# Altium PCB doergreie.PcbDoc
Units mil, origin at the board's own origin, x right, y up, seen from the top; angles counter-clockwise.
Board outline 1015 x 975 mil, 2 copper layers (Top Layer, Bottom Layer); 6 components, 7 nets, 29 pads, 0 vias.
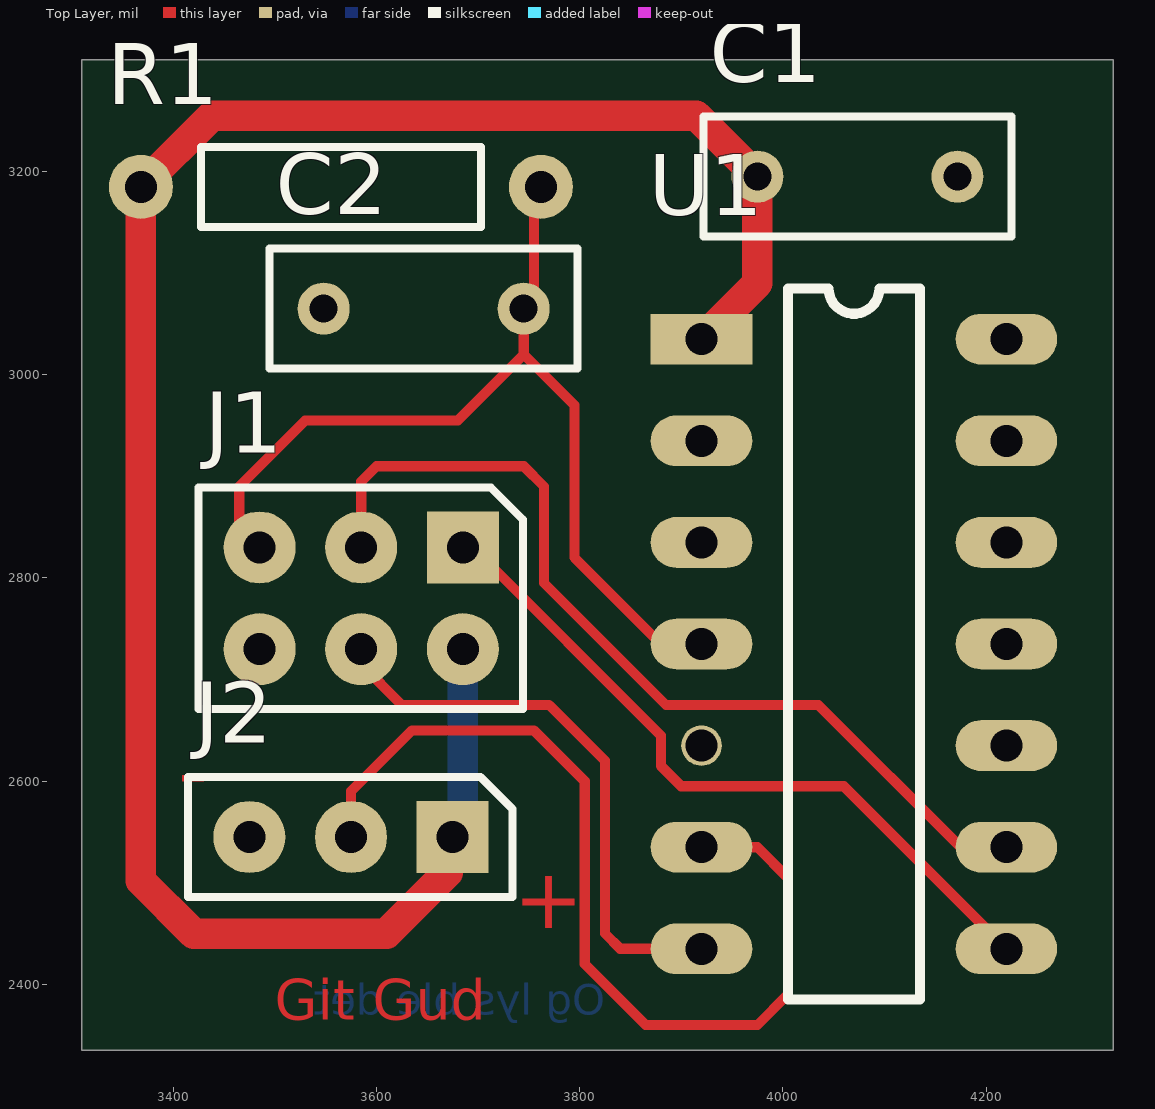
[diagram p0: Top Layer view]
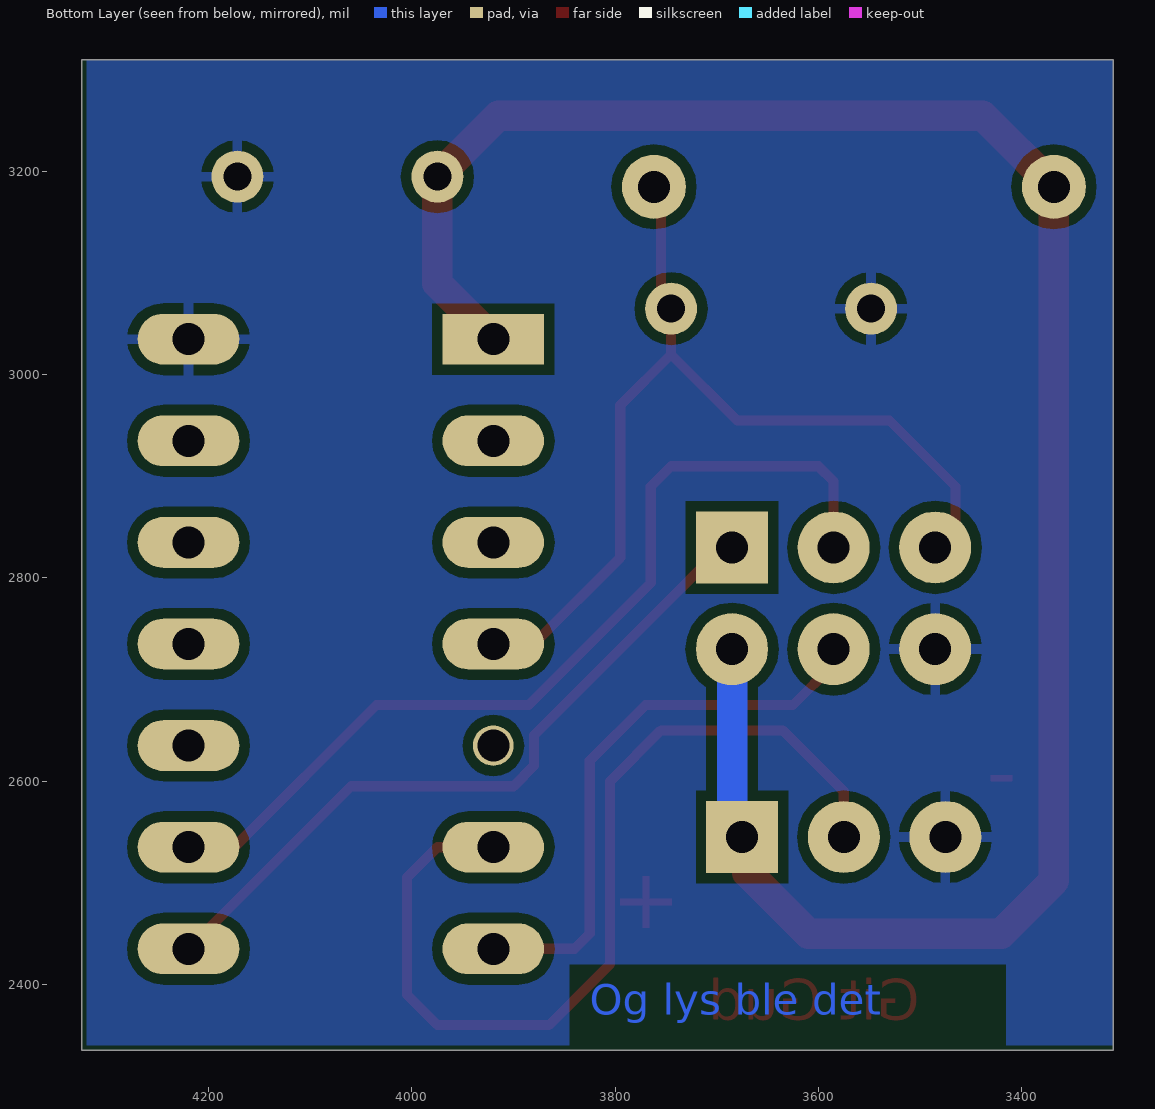
[diagram p1: Bottom Layer view, seen from below]
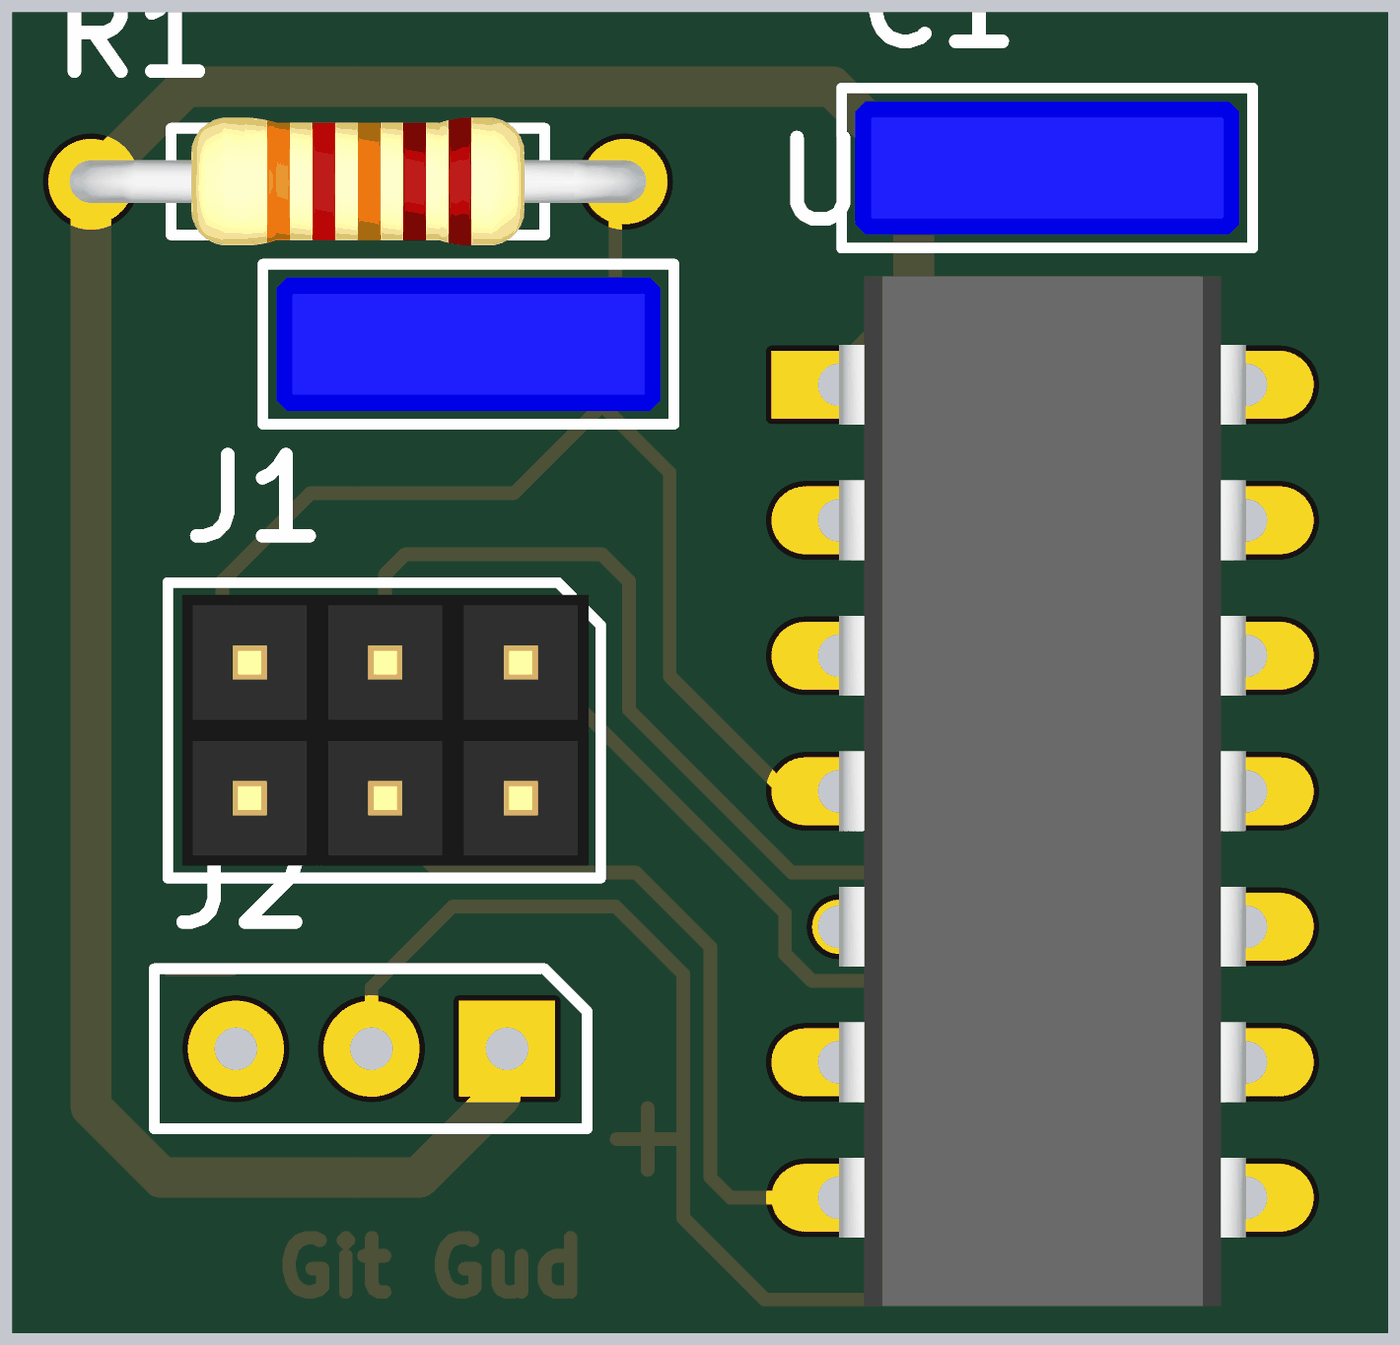
[diagram p2: 3D render of the assembled board from above, using the file's embedded part models]

## Layer stack, top to bottom
Top Solder: solder mask 0.4, Solder Resist, Dk 3.5
Top Layer: signal copper 1.4
Dielectric 1: dielectric 12.6, FR-4, Dk 4.8
Bottom Layer: signal copper 1.4
Bottom Solder: solder mask 0.4, Solder Resist, Dk 3.5

## Board outline
3310,3310 3310,2335 4325,2335 4325,3310

## Design rules (kind name [scope] priority, off if disabled: settings)
Clearance [All] p1: gap=10
PolygonConnect [All] p1: connectstyle=Relief reliefconductorwidth=10 reliefentries=4 polygonreliefangle="90 Angle" airgapwidth=10
RoutingVias [All] p1: holewidth=28 width=50 viastyle="Through Hole" minholewidth=28 minwidth=50 maxholewidth=28 maxwidth=50
SolderMaskExpansion [All] p1: expansion=4
Width [All] p1: maxlimit=50 minlimit=10 preferedwidth=10
30 further rules are at their usual default settings.

## Components (designator, comment, footprint, x,y, rotation, side; value= is the part's Value field where it differs from the comment)
C1 "100nF" CAPAR500W50L730T250H650 4171.85,3195 r180 top
C2 "100nF" CAPAR500W50L730T250H650 3548.15,3065 r0 top
J1 "Header2x3" HDRV6W64P254_2X3_762X508X900B 3585,2780 r270 top
J2 "Header1x3" HDRV3W64P254_1X3_762X254X900B 3575,2545 r270 top
R1 "56k" RESA_0.25W 3565,3185 r180 top
U1 "ATTINY84-20PU" DIP14 3920,3035 r0 top

## Footprints (in the part's own frame and the unit in brackets; to place one, negate y for a bottom-side part, rotate by r counter-clockwise, add the part's x,y. Pads: shape width x height; smd on the part's side, far side on the other; paste and mask are expansions set on the pad)
CAPAR500W50L730T250H650 [mm] "Lead Spacing=5.0mm, Lead Width=0.5mm, Body Length=7.3mm, Body thickness=2.5mm, Body Height=6.5mm"
  round 1.3 hole 0.7: 1(0,0) 2(5,0)
  silkscreen extent -1.35,-1.5 6.35,1.5, body extent -1.1,-1.25 6.1,1.25, height 6.5
DIP14 [mm]
  rect 2.54x1.27 hole 0.8: 1(0,0)
  oval 2.54x1.27 hole 0.8: 2(0,-2.54) 3(0,-5.08) 4(0,-7.62) 6(0,-12.7) 7(0,-15.24) 8(7.62,-15.24) 9(7.62,-12.7) 10(7.62,-10.16) 11(7.62,-7.62) 12(7.62,-5.08) 13(7.62,-2.54) 14(7.62,0)
  round 1.016 hole 0.8: 5(0,-10.16)
  silkscreen extent 2.16,-16.51 5.46,1.27, body extent 0,-17.27 7.62,2.03, height 4.15
HDRV3W64P254_1X3_762X254X900B [mm] "Header 1x3"
  rect 1.8x1.8 hole 0.8: 1(0,2.54)
  round 1.8 hole 0.8: 2(0,0) 3(0,-2.54)
  silkscreen extent -1.5,-4.07 1.5,4.04
HDRV6W64P254_2X3_762X508X900B [mm] "Header 2x3"
  rect 1.8x1.8 hole 0.8: 1(-1.27,2.54)
  round 1.8 hole 0.8: 2(1.27,2.54) 3(-1.27,0) 4(1.27,0) 5(-1.27,-2.54) 6(1.27,-2.54)
  silkscreen extent -2.77,-4.07 2.77,4.04, body extent -2.54,-3.81 2.54,3.81, height 8.45
RESA_0.25W [mm]
  round 1.6 hole 0.8: 1(-5,0) 2(5,0)
  silkscreen extent -3.5,-1 3.5,1, body extent -5.4,-1.2 5.4,1.2, height 2.6

## Part data
C1 C2: library part 3269, "100V plast"
J1: library part 3187
J2: library part 2430
R1: library part 2849, "0.25W 1% Generic resistor"
U1: library part 2154

## Nets (pads, with @x,y where several pads share a name; then routed paths per layer and width w, separated by ;. In a path a pad name is that pad's centre, name@x,y a point inside that pad or via, vN(x,y) a via of type N, cw(c..) or ccw(c..) an arc to the next point about the centre after c; other vN are vias at no path point)
GND: C1.1 C2.1 J1.6 J2.3 U1.14
NetC2_2: C2.2 J1.5 R1.1 U1.4 | length 946.7
  Top Layer w10: J1.5@3465,2830 3465,2890 3530,2955 3680,2955 3745,3020 ; R1.1 3755,3178.15 3755,3075 C2.2 3745,3020 ; U1.4 3880,2735 3795,2820 3795,2970 3745,3020
NetJ1_1: J1.1 U1.8 | length 716.2
  Top Layer w10: J1.1 3695,2830 3880,2645 3880,2615 3900,2595 4060,2595 U1.8
NetJ1_3: J1.3 U1.9 | length 917.2
  Top Layer w10: J1.3 3585,2895 3600,2910 3745,2910 3765,2890 3765,2795 3885,2675 4035,2675 4175,2535 U1.9
NetJ1_4: J1.4 U1.7 | length 565.6
  Top Layer w10: J1.4 3585,2715 3625,2675 3770,2675 3825,2620 3825,2450 3840,2435 U1.7
NetJ2_2: J2.2 U1.6 | length 970.3
  Top Layer w10: J2.2@3560,2530 J2.2@3560,2550 ; J2.2 3575,2590 3635,2650 3755,2650 3805,2600 3805,2420 3865,2360 3975,2360 4005,2390 4005,2505 3975,2535 U1.6
VCC: C1.2 J1.2 J2.1 R1.2 U1.1 | length 2149.3
  Top Layer w10: J2.1@3670,2560 J2.1@3680,2570
  Top Layer w30: J1.2@3665,2730 J1.2@3680,2715 ; J2.1@3670,2560 3670,2510 3610,2450 3420,2450 3368.15,2501.85 R1.2 3438.15,3255 3915,3255 C1.2 3975,3090 U1.1
  Bottom Layer w10: J2.1 J2.1@3685,2555
  Bottom Layer w30: J2.1@3685,2555 J1.2
pads on no net: U1.2 U1.3 U1.5 U1.10 U1.11 U1.12 U1.13

## Polygon pours and split planes (outlines as drawn)
GND on Bottom Layer "BTM_GND" (solid, remove dead copper, pour order 0): 3310,3310 3310,2340 4320,2340 4320,3310

## Other copper
Top Layer:
  text "-" at 3405,2580 h60
  text "+" at 3735,2455 h60
  text "Git Gud" at 3500,2365 h40
Bottom Layer:
  text "Og lys ble det" at 3825,2370 h30